# EAGLE board M20050-1 GPS Breakout Board 2 (EAGLE 9.6.2)
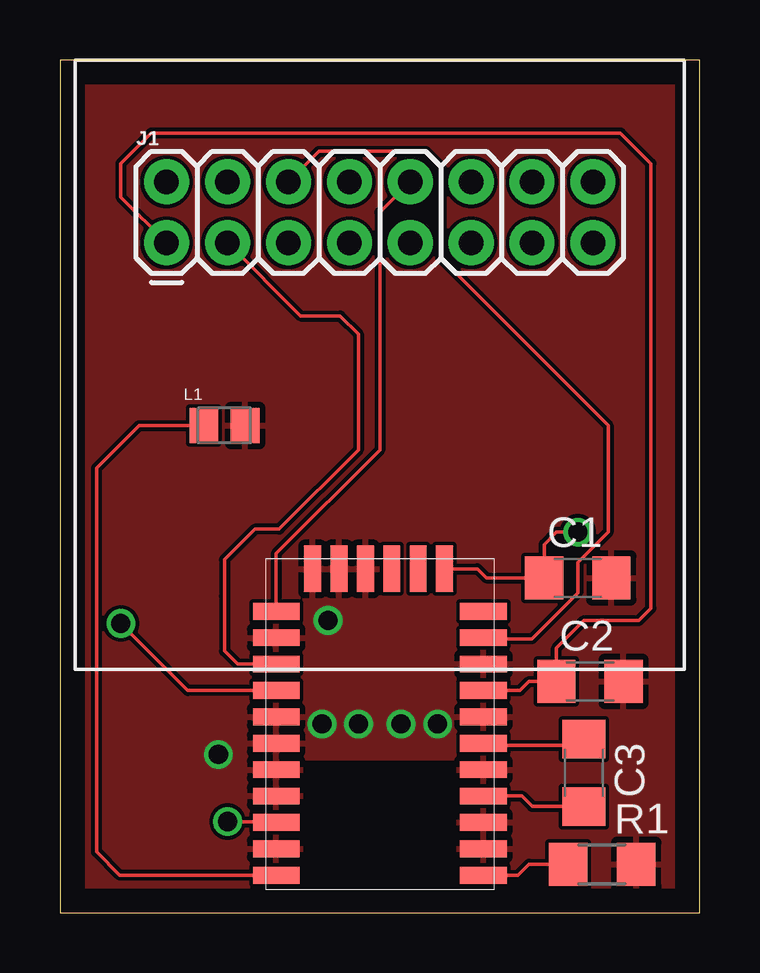
[diagram p0: board, top side]
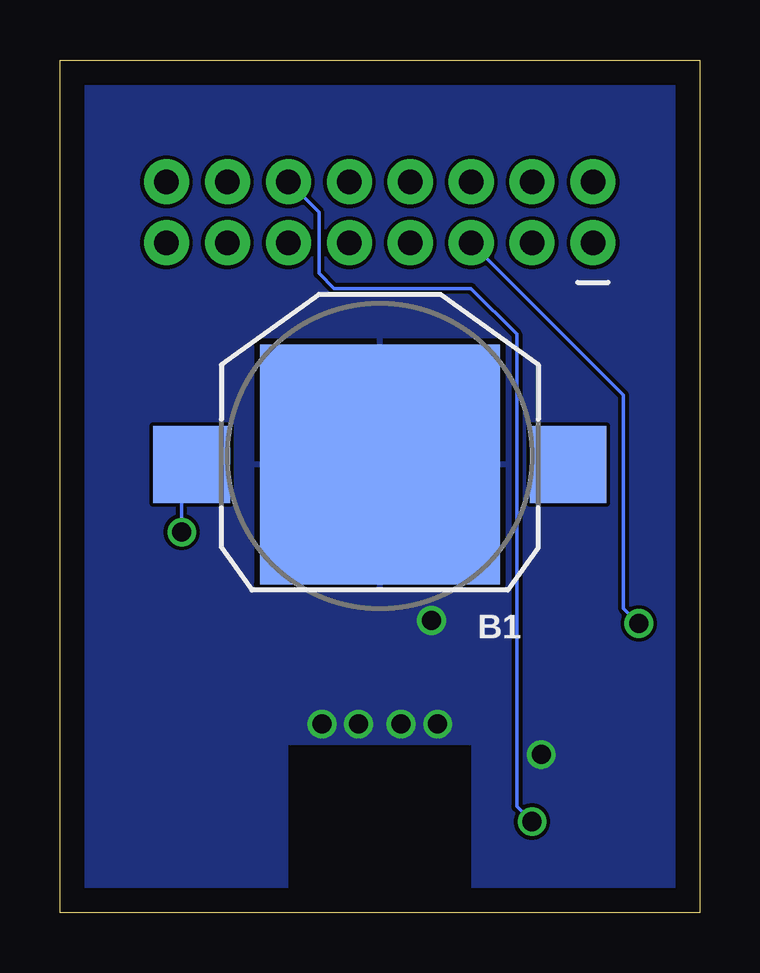
[diagram p1: board, bottom side, seen from below]

Size 26.67 x 35.56 mm. Coordinates in mm from the lower left corner, seen from the top.
Outline: 0,0 26.67,0 26.67,35.56 0,35.56 0,0
Copper layers (1*16): Top 0.035mm / dielectric 1.5mm / Bottom 0.035mm
Design rules "default *": minimum track width 6mil, minimum drill 31.25mil, track to track 6mil, track to pad 6mil, pad to pad 6mil, via to via 6mil, smd to smd 6mil, copper to edge 40mil, drill to drill 6mil, minimum pad ring 10mil, minimum via ring 8mil, stop-mask expansion 4mil, vias tented up to drill 0mil, thermal gap 10mil
tKeepout: area 10.2,0 to 16.5,6.3
tRestrict: area 10.2,0 to 16.5,6.3
bRestrict: area 9.5,0 to 17.1,7

## Footprints (pad centres in the part's own frame; a part is rotated, then mirrored left to right if it is on the bottom)
M20050-1_GPS = smd 1.94 x 0.7: P1 -4.32,6.3; P2 -4.32,5.2; P3 -4.32,4.1; P4 -4.32,3; P5 -4.32,1.9; P6 -4.32,0.8; P7 -4.32,-0.3; P8 -4.32,-1.4; P9 -4.32,-2.5; P10 -4.32,-3.6; P11 -4.32,-4.7; P18 4.32,-4.7; P19 4.32,-3.6; P20 4.32,-2.5; P21 4.32,-1.4; P22 4.32,-0.3; P23 4.32,0.8; P24 4.32,1.9; P25 4.32,3; P26 4.32,4.1; P27 4.32,5.2; P28 4.32,6.3 | smd 0.7 x 1.94: P12 -2.7,-6.47; P13 -1.6,-6.47; P14 -0.5,-6.47; P15 0.6,-6.47; P16 1.7,-6.47; P17 2.8,-6.47
3000K = smd 3.2 x 3.2: + 7.85,0.35; ++ -7.85,0.35 | smd 10 x 10: - 0,0.35
C1206 = smd 1.6 x 1.8: 1 -1.4,0; 2 1.4,0
2X7 = drill 1.016 pad 1.88: 1 -8.89,5.08; 2 -8.89,7.62; 3 -6.35,5.08; 4 -6.35,7.62; 5 -3.81,5.08; 6 -3.81,7.62; 7 -1.27,5.08; 8 -1.27,7.62; 9 1.27,5.08; 10 1.27,7.62; 11 3.81,5.08; 12 3.81,7.62; 13 6.35,5.08; 14 6.35,7.62; 15 8.89,5.08; 16 8.89,7.62
INDC2012X105N = smd 1.2 x 1.47: 1 -0.86,0; 2 0.86,0
R1206 = smd 1.6 x 1.803: 1 -1.422,0; 2 1.422,0

## Placement (x,y rotation side)
A1  [M20050-1_GPS]  13.34,7.87 180 top
B1  3000K  [3000K]  13.34,19.05 180 bottom
C1  22p  [C1206]  21.59,13.97 0 top
C2  2.2u  [C1206]  22.1,9.65 0 top
C3  22p  [C1206]  21.84,5.84 270 top
J1  2X6 FEMALE  [2X7]  13.34,22.86 0 top
L1  1.8n  [INDC2012X105N]  6.86,20.32 0 top
R1  0R  [R1206]  22.61,2.03 0 top

## Library data of the parts
A1 = M20050-1 GPS
B1 = b_keystone_3000k_sm_battery
C1-C3 R1 = RTR Main Library
J1 = RTR Main Library; PROD_ID: CONN-12423
L1 = AIMC-0805-1N8S-T; DESCRIPTION: IND 1.8nH 0.3A 100mΩ; DIGI-KEY_PART_NUMBER: 535-11559-1-ND; MF: Abracon; MP: AIMC-0805-1N8S-T; PACKAGE: 2012 Bourns; PURCHASE-URL: https://pricing.snapeda.com/search/part/AIMC-0805-1N8S-T/?ref=eda

## Nets
BV: A1.P12 B1.+ C1.1
FIX: A1.P18 J1.10
GND: A1.P2 A1.P3 A1.P5 A1.P7 A1.P9 A1.P15 A1.P16 A1.P17 A1.P19 A1.P22 A1.P23 A1.P24 A1.P25 A1.P27 B1.- C1.2 C2.2 L1.2 R1.2
N$1: A1.P6 C3.1
N$2: A1.P4 C3.2
N$3: A1.P1 R1.1
N$4: A1.P28 L1.1
RST: A1.P10 J1.6
RX: A1.P21 J1.5
STB: A1.P26 J1.12
TX: A1.P20 J1.3
VCC: A1.P8 C2.1 J1.1

## Tracks (layer width: path | path; a pad name or v marks a point on that pad's centre or on a via)
BV  (via drill 0.79)
  Top 0.152: v21.59,15.88 20.7,15.88 20.19,15.36 C1.1 17.78,13.97 17.41,14.34 A1.P12
  Bottom 0.152: v21.59,15.88 21.59,18.41 B1.+
FIX
  Top 0.152: J1.10 13.34,29.21 13.34,19.3 9.02,14.98 A1.P18
GND  (via drill 0.79)
  other vias: 14.22,7.87 15.75,7.87 10.92,7.87 12.45,7.87 11.18,12.19 6.6,6.6
  pour Top: -6.35,39.37 33.02,39.37 33.02,-6.35 -6.35,-6.35
  pour Bottom: -7.62,40.64 35.56,40.64 35.56,-7.62 -8.89,-7.62 -8.89,40.64
N$1
  Top 0.152: C3.1 21.59,6.99 17.78,6.99 A1.P6
N$2
  Top 0.152: A1.P4 19.26,4.87 19.69,4.44 C3.2
N$3
  Top 0.152: A1.P1 19.1,1.57 19.56,2.03 R1.1
N$4
  Top 0.152: A1.P28 2.49,1.57 1.52,2.54 1.52,18.54 3.3,20.32 4.06,20.32 | 4.06,20.32 L1.1 | 4.06,20.32
RST
  Top 0.152: J1.6 10.79,31.75 15.24,31.75 15.88,31.11 15.88,27.3 22.86,20.32 22.86,15.88 21.59,14.61 21.59,13.34 19.68,11.43 17.78,11.43 A1.P10
RX  (via drill 0.79)
  Top 0.152: A1.P21 5.33,9.27 v2.54,12.06
  Bottom 0.152: v2.54,12.06 3.17,12.7 3.17,21.59 J1.5
STB  (via drill 0.79)
  Top 0.152: v6.99,3.81 8.89,3.81 A1.P26
  Bottom 0.152: v6.99,3.81 7.62,4.45 7.62,24.13 9.53,26.04 15.24,26.04 15.88,26.67 15.88,29.21 J1.12
TX
  Top 0.152: J1.3 10.03,24.89 11.68,24.89 12.45,24.13 12.45,19.3 9.14,16 8.13,16 6.86,14.73 6.86,13.21 6.86,10.92 7.41,10.37 A1.P20
VCC
  Top 0.152: A1.P8 19.18,9.27 19.56,9.65 C2.1 20.7,11.05 21.84,12.19 24.13,12.19 24.64,12.7 24.64,31.24 23.37,32.51 3.81,32.51 2.54,31.24 2.54,29.84 J1.1